# EAGLE board esp-module-cu (EAGLE 9.6.2)
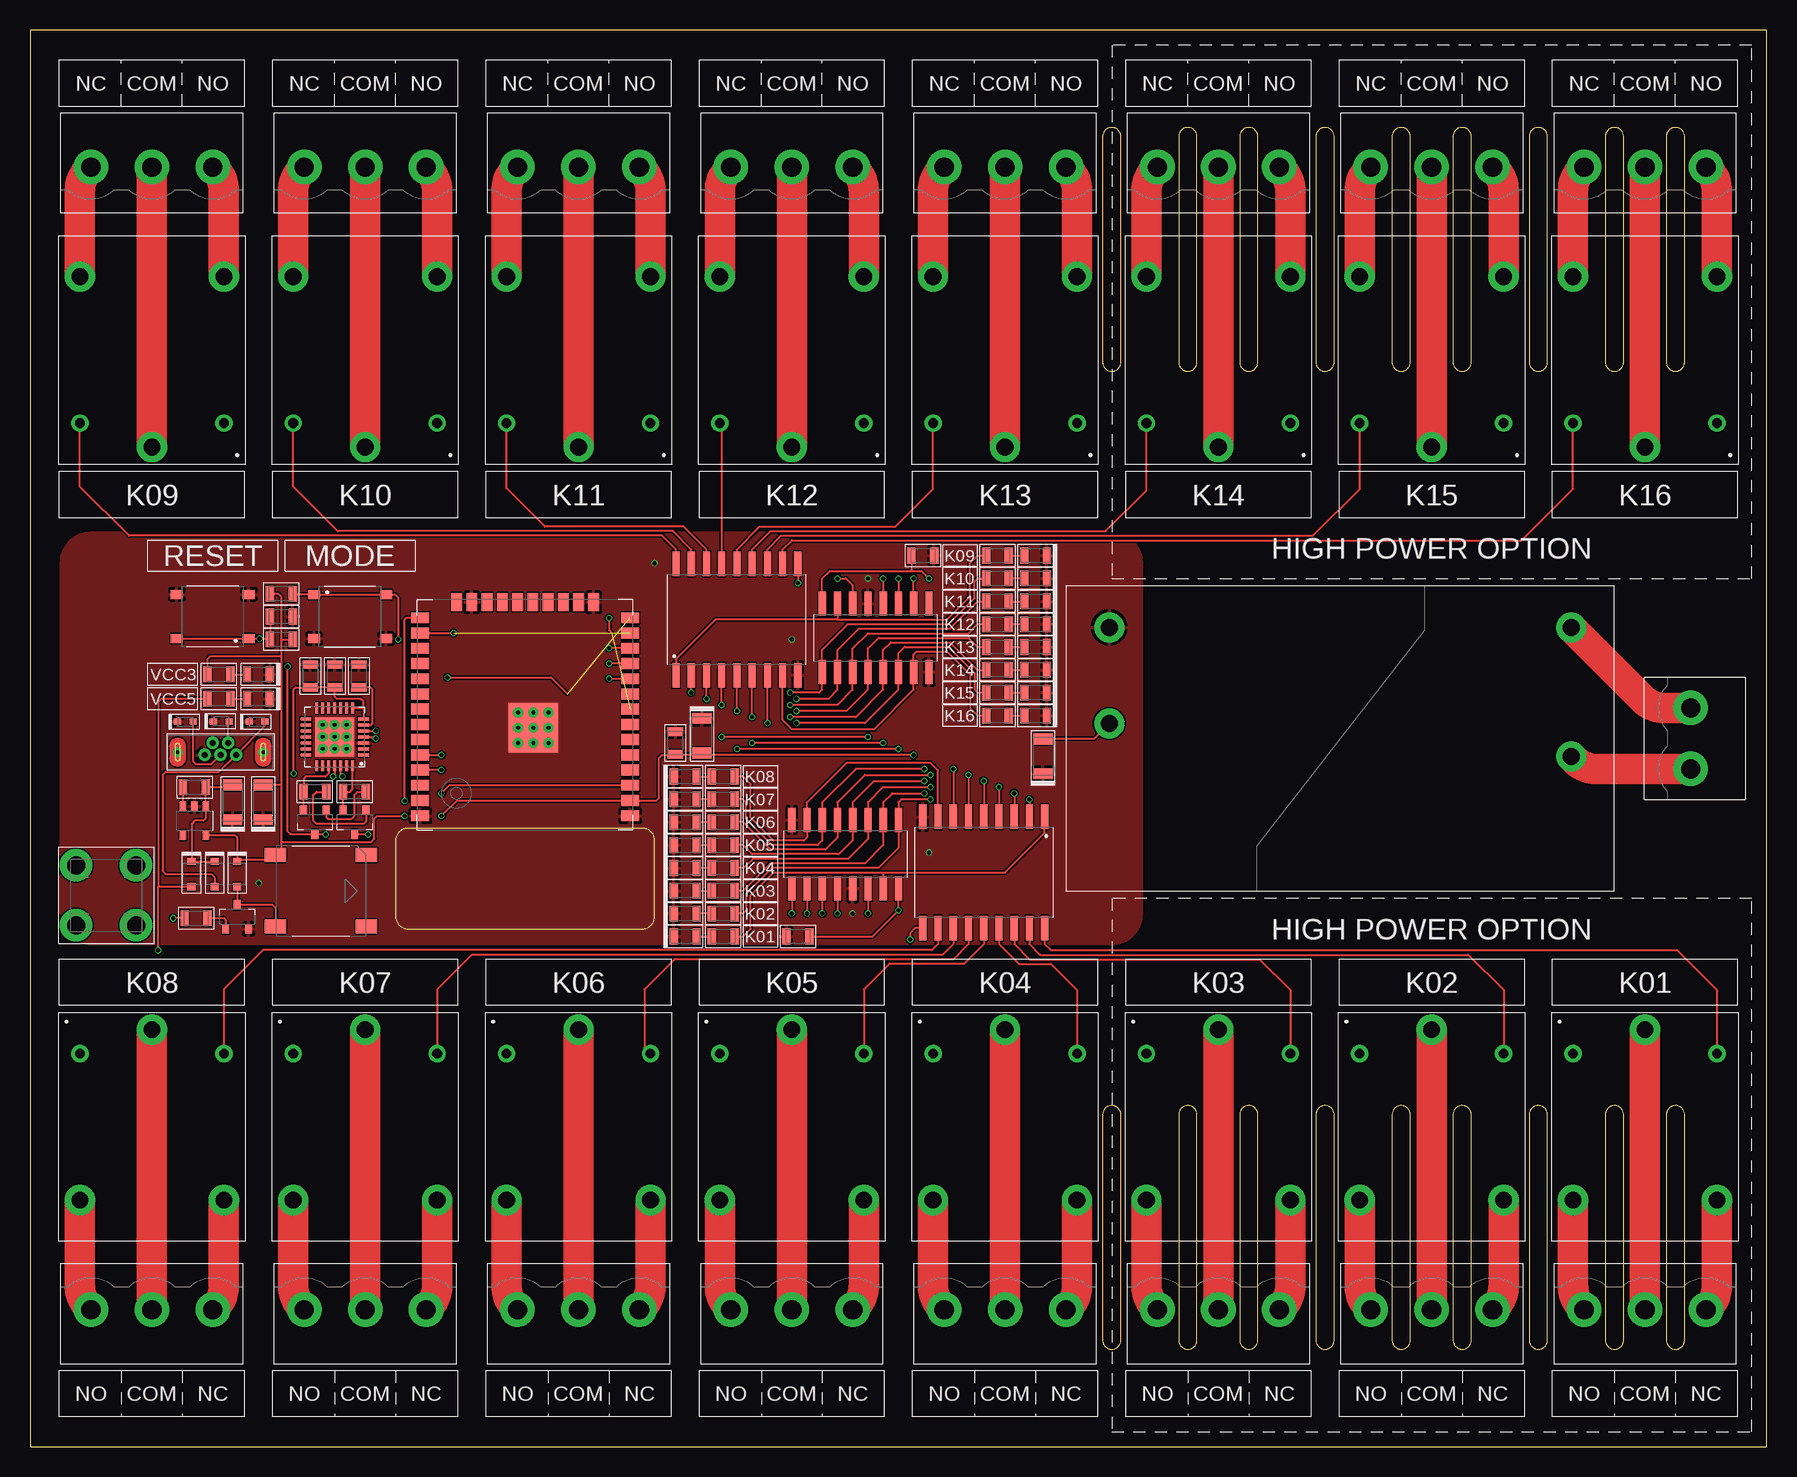
[diagram p0: board, top side]
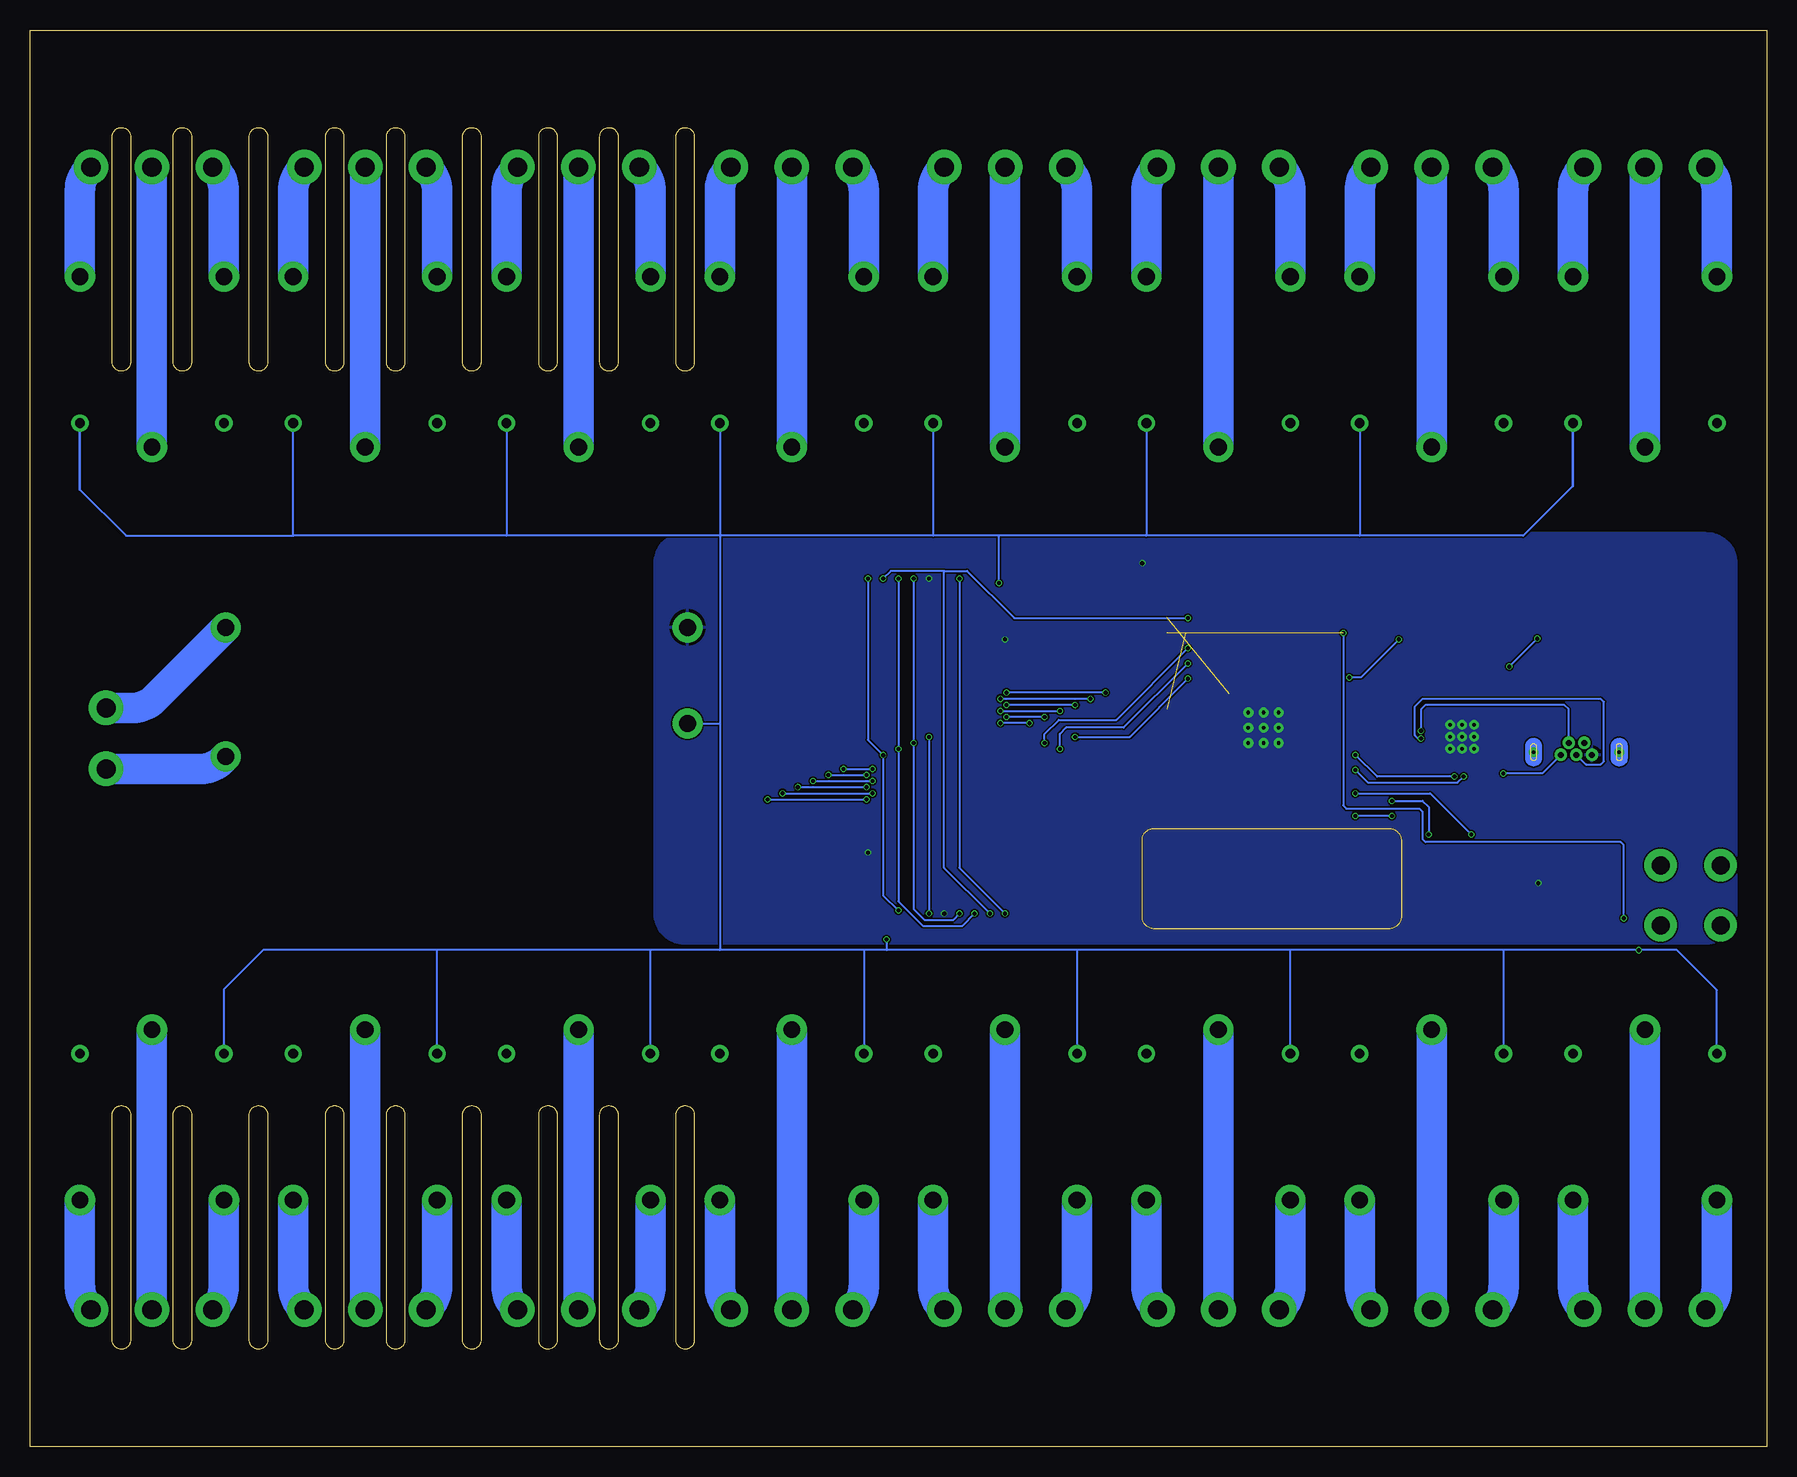
[diagram p1: board, bottom side, seen from below]

Size 144.78 x 118.11 mm. Coordinates in mm from the lower left corner, seen from the top.
Outline: 0,0 144.76,0 144.78,118.11 0,118.11 0,0
Copper layers (1*16): Top 0.035mm / dielectric 1.6mm / Bottom 0.035mm
Design rules "jlcpcb-2layers": minimum track width 5mil, minimum drill 0.3mm, track to track 5mil, track to pad 5mil, pad to pad 5mil, via to via 5mil, smd to smd 5mil, copper to edge 0.2mm, drill to drill 6mil, minimum pad ring 10mil, minimum via ring 3mil, stop-mask expansion 4mil, vias tented up to drill 0mil, thermal gap 10mil
Milling: 116 lines

## Footprints (pad centres in the part's own frame; a part is rotated, then mirrored left to right if it is on the bottom)
I1206-M3216-D = smd 0.9 x 1.6: 1 -1.45,0; 2 1.45,0
I0805-M2012-C = smd 0.7 x 1.3: 1 -0.95,0; 2 0.95,0
SOD-523 = smd 0.6 x 0.5: 1 -0.66,0; 2 0.66,0
SOD-323 = smd 0.6 x 0.7: 1 -1.055,0; 2 1.055,0
USB-A-MICRO-TOP = drill 0.5 pad 0.9: 1 -1.3,0.22; 2 -0.65,-0.78; 3 0,0.22; 4 0.65,-0.78; 5 1.3,0.22 | drill 0.3 pad 0.36: 6 3.57,0; 7 -3.57,0
KF2EDGV-5.08-2P = drill 1.6: 1 -2.54,0; 2 2.54,0
KF2EDGV-5.08-3P = drill 1.6: 1 -5.08,0; 2 0,0; 3 5.08,0
SRD = drill 0.8: 1 -6,6.1; 2 6,6.1 | drill 1.4: 3 0,8.1; 4 6,-6.1; 5 -6,-6.1
I0805-M2012-D = smd 0.7 x 1.3: 1 -0.95,0; 2 0.95,0
SMA = drill 1.5: 1 -2.5,2.5; 2 2.5,2.5; 3 -2.5,-2.5; 4 2.5,-2.5
IRM-10 = drill 1.4: 1 -19.25,-9.25; 2 -19.25,1.5; 3 19.25,-1.25; 4 19.25,-9.25
I0805-M2012-R = smd 0.7 x 1.3: 1 -0.95,0; 2 0.95,0
SMD-SW-4 = smd 1 x 0.75: 1 -3,1.85; 2 3,1.85; 3 -3,-1.85; 4 3,-1.85
SOT-23-3 = smd 0.8 x 0.6: 1 1.01,-0.95; 2 1.01,0.95; 3 -1.01,0
QFN-28 = smd 0.9 x 0.25: 1 -2.4,1.5; 2 -2.4,1; 3 -2.4,0.5; 4 -2.4,0; 5 -2.4,-0.5; 6 -2.4,-1; 7 -2.4,-1.5; 15 2.4,-1.5; 16 2.4,-1; 17 2.4,-0.5; 18 2.4,0; 19 2.4,0.5; 20 2.4,1; 21 2.4,1.5 | smd 0.25 x 0.9: 8 -1.5,-2.4; 9 -1,-2.4; 10 -0.5,-2.4; 11 0,-2.4; 12 0.5,-2.4; 13 1,-2.4; 14 1.5,-2.4; 22 1.5,2.4; 23 1,2.4; 24 0.5,2.4; 25 0,2.4; 26 -0.5,2.4; 27 -1,2.4; 28 -1.5,2.4 | smd 3.25 x 3.25: 29 0,0 | drill 0.3 pad 0.5: 30 -1,1; 31 0,1; 32 1,1; 33 -1,0; 34 0,0; 35 1,0; 36 -1,-1; 37 0,-1; 38 1,-1
SMD-BUZZER = smd 1.78 x 1.15: 1 -3.795,2.98; 2 -3.795,-2.98; 3 3.795,-2.98; 4 3.795,2.98
ESP32-WROOM-32UE = smd 1.5 x 0.9: 1 -8.75,7.34; 2 -8.75,6.07; 3 -8.75,4.8; 4 -8.75,3.53; 5 -8.75,2.26; 6 -8.75,0.99; 7 -8.75,-0.28; 8 -8.75,-1.55; 9 -8.75,-2.82; 10 -8.75,-4.09; 11 -8.75,-5.36; 12 -8.75,-6.63; 13 -8.75,-7.9; 14 -8.75,-9.17; 25 8.75,-9.17; 26 8.75,-7.9; 27 8.75,-6.63; 28 8.75,-5.36; 29 8.75,-4.09; 30 8.75,-2.82; 31 8.75,-1.55; 32 8.75,-0.28; 33 8.75,0.99; 34 8.75,2.26; 35 8.75,3.53; 36 8.75,4.8; 37 8.75,6.07; 38 8.75,7.34 | smd 0.9 x 1.5: 15 -5.715,-10.47; 16 -4.445,-10.47; 17 -3.175,-10.47; 18 -1.905,-10.47; 19 -0.635,-10.47; 20 0.635,-10.47; 21 1.905,-10.47; 22 3.175,-10.47; 23 4.445,-10.47; 24 5.715,-10.47 | smd 4.1 x 4.1: 39 -0.68,0 | drill 0.3 pad 0.5: 40 0.59,-1.27; 41 -0.68,-1.27; 42 -1.95,-1.27; 43 0.59,0; 44 -0.68,0; 45 -1.95,0; 46 0.59,1.27; 47 -0.68,1.27; 48 -1.95,1.27
SOIC-16 = smd 2 x 0.6: 1 -2.86,4.445; 2 -2.86,3.175; 3 -2.86,1.905; 4 -2.86,0.635; 5 -2.86,-0.635; 6 -2.86,-1.905; 7 -2.86,-3.175; 8 -2.86,-4.445; 9 2.86,-4.445; 10 2.86,-3.175; 11 2.86,-1.905; 12 2.86,-0.635; 13 2.86,0.635; 14 2.86,1.905; 15 2.86,3.175; 16 2.86,4.445
SOIC-18 = smd 2.06 x 0.6: 1 -4.64,5.08; 2 -4.64,3.81; 3 -4.64,2.54; 4 -4.64,1.27; 5 -4.64,0; 6 -4.64,-1.27; 7 -4.64,-2.54; 8 -4.64,-3.81; 9 -4.64,-5.08; 10 4.64,-5.08; 11 4.64,-3.81; 12 4.64,-2.54; 13 4.64,-1.27; 14 4.64,0; 15 4.64,1.27; 16 4.64,2.54; 17 4.64,3.81; 18 4.64,5.08
SOT-25-5 = smd 0.55 x 0.8: 1 0.95,1.2; 2 0,1.2; 3 -0.95,1.2; 4 -0.95,-1.2; 5 0.95,-1.2

## Placement (x,y rotation side)
C1  22uF  [I1206-M3216-D]  84.45,57.56 270 top
C2  1U  [I0805-M2012-C]  25.4,64.26 270 top
C3  100nF  [I0805-M2012-C]  23.37,64.26 270 top
C4  22uF  [I1206-M3216-D]  16.89,53.72 270 top
C5  22uF  [I1206-M3216-D]  19.43,53.72 270 top
C6  10uF  [I1206-M3216-D]  56.01,59.28 90 top
C7  100nF  [I0805-M2012-C]  53.8,58.67 90 top
C8  100nF  [I0805-M2012-C]  20.95,69.22 0 top
C9  100nF  [I0805-M2012-C]  27.43,64.26 270 top
C10  100nF  [I0805-M2012-C]  64.01,42.55 180 top
C11  100nF  [I0805-M2012-C]  74.42,74.3 0 top
D1  5.0V  [SOD-523]  18.92,60.45 180 top
D2  30V  [SOD-323]  13.46,47.75 90 top
D3  5.0V  [SOD-523]  12.95,60.45 180 top
D4  5.0V  [SOD-523]  15.95,60.48 180 top
D5  30V  [SOD-323]  15.39,47.75 90 top
D8  30V  [SOD-323]  17.27,47.75 90 top
J1  USB-A-MICRO-TOP  [USB-A-MICRO-TOP]  15.88,57.91 180 top
J2  2P  [KF2EDGV-5.08-2P]  138.43,59.05 90 top
J5  3P  [KF2EDGV-5.08-3P]  134.62,11.43 0 top
J6  3P  [KF2EDGV-5.08-3P]  116.84,11.43 0 top
J7  3P  [KF2EDGV-5.08-3P]  99.06,11.43 0 top
J8  3P  [KF2EDGV-5.08-3P]  81.28,11.43 0 top
J9  3P  [KF2EDGV-5.08-3P]  63.5,11.43 0 top
J10  3P  [KF2EDGV-5.08-3P]  45.72,11.43 0 top
J11  3P  [KF2EDGV-5.08-3P]  27.94,11.43 0 top
J12  3P  [KF2EDGV-5.08-3P]  10.16,11.43 0 top
J13  3P  [KF2EDGV-5.08-3P]  10.16,106.68 180 top
J14  3P  [KF2EDGV-5.08-3P]  27.94,106.68 180 top
J15  3P  [KF2EDGV-5.08-3P]  45.72,106.68 180 top
J16  3P  [KF2EDGV-5.08-3P]  63.5,106.68 180 top
J17  3P  [KF2EDGV-5.08-3P]  81.28,106.68 180 top
J18  3P  [KF2EDGV-5.08-3P]  99.06,106.68 180 top
J19  3P  [KF2EDGV-5.08-3P]  116.84,106.68 180 top
J20  3P  [KF2EDGV-5.08-3P]  134.62,106.68 180 top
K1  5V  [SRD]  134.62,26.67 0 top
K2  5V  [SRD]  116.84,26.67 0 top
K3  5V  [SRD]  99.06,26.67 0 top
K4  5V  [SRD]  81.28,26.67 0 top
K5  5V  [SRD]  63.5,26.67 0 top
K6  5V  [SRD]  45.72,26.67 0 top
K7  5V  [SRD]  27.94,26.67 0 top
K8  5V  [SRD]  10.16,26.67 0 top
K9  5V  [SRD]  10.16,91.44 180 top
K10  5V  [SRD]  27.94,91.44 180 top
K11  5V  [SRD]  45.72,91.44 180 top
K12  5V  [SRD]  63.5,91.44 180 top
K13  5V  [SRD]  81.28,91.44 180 top
K14  5V  [SRD]  99.06,91.44 180 top
K15  5V  [SRD]  116.84,91.44 180 top
K16  5V  [SRD]  134.62,91.44 180 top
LED1  RED  [I0805-M2012-D]  19.05,62.36 0 top
LED2  RED  [I0805-M2012-D]  19.05,64.39 0 top
LED5  RED  [I0805-M2012-D]  54.61,42.55 180 top
LED6  RED  [I0805-M2012-D]  54.61,44.45 180 top
LED7  RED  [I0805-M2012-D]  54.61,46.35 180 top
LED8  RED  [I0805-M2012-D]  54.61,48.26 180 top
LED9  RED  [I0805-M2012-D]  54.61,50.16 180 top
LED10  RED  [I0805-M2012-D]  54.61,52.07 180 top
LED11  RED  [I0805-M2012-D]  54.61,53.98 180 top
LED12  RED  [I0805-M2012-D]  54.61,55.88 180 top
LED13  RED  [I0805-M2012-D]  83.82,74.3 0 top
LED14  RED  [I0805-M2012-D]  83.82,72.39 0 top
LED15  RED  [I0805-M2012-D]  83.82,70.48 0 top
LED16  RED  [I0805-M2012-D]  83.82,68.58 0 top
LED17  RED  [I0805-M2012-D]  83.82,66.67 0 top
LED18  RED  [I0805-M2012-D]  83.82,64.77 0 top
LED19  RED  [I0805-M2012-D]  83.82,62.87 0 top
LED20  RED  [I0805-M2012-D]  83.82,60.96 0 top
P1  2P  [CONNECTOR-DEFAULT]  140.97,59.05 180 top
P3  3P  [CONNECTOR-DEFAULT]  134.62,8.26 0 top
P4  3P  [CONNECTOR-DEFAULT]  116.84,8.26 0 top
P5  3P  [CONNECTOR-DEFAULT]  99.06,8.26 0 top
P6  3P  [CONNECTOR-DEFAULT]  81.28,8.26 0 top
P7  3P  [CONNECTOR-DEFAULT]  63.5,8.26 0 top
P8  3P  [CONNECTOR-DEFAULT]  45.72,8.26 0 top
P9  3P  [CONNECTOR-DEFAULT]  27.94,8.26 0 top
P10  3P  [CONNECTOR-DEFAULT]  10.16,8.26 0 top
P11  3P  [CONNECTOR-DEFAULT]  10.16,109.86 0 top
P12  3P  [CONNECTOR-DEFAULT]  27.94,109.86 0 top
P13  3P  [CONNECTOR-DEFAULT]  45.72,109.86 0 top
P14  3P  [CONNECTOR-DEFAULT]  63.5,109.86 0 top
P15  3P  [CONNECTOR-DEFAULT]  81.28,109.86 0 top
P16  3P  [CONNECTOR-DEFAULT]  99.06,109.86 0 top
P17  3P  [CONNECTOR-DEFAULT]  116.84,109.86 0 top
P18  3P  [CONNECTOR-DEFAULT]  134.62,109.86 0 top
P19  IPEX-SMA  [SMA]  6.35,45.97 0 top
PU1  IRM-10-5  [IRM-10]  109.22,59.05 180 top
R1  10k  [I0805-M2012-R]  27.05,54.61 0 top
R2  10k  [I0805-M2012-R]  23.75,54.61 0 top
R3  10k  [I0805-M2012-R]  20.95,67.31 180 top
R4  220  [I0805-M2012-R]  15.75,62.36 0 top
R5  220  [I0805-M2012-R]  15.75,64.39 0 top
R6  100k  [I0805-M2012-R]  13.72,54.99 180 top
R8  220  [I0805-M2012-R]  57.78,42.55 180 top
R9  220  [I0805-M2012-R]  57.78,44.45 180 top
R10  220  [I0805-M2012-R]  57.78,46.35 180 top
R11  220  [I0805-M2012-R]  57.78,48.26 180 top
R12  220  [I0805-M2012-R]  57.78,50.16 180 top
R13  220  [I0805-M2012-R]  57.78,52.07 180 top
R14  220  [I0805-M2012-R]  57.78,53.98 180 top
R15  220  [I0805-M2012-R]  57.78,55.88 180 top
R16  220  [I0805-M2012-R]  80.64,74.3 0 top
R17  220  [I0805-M2012-R]  80.64,72.39 0 top
R18  220  [I0805-M2012-R]  80.64,70.48 0 top
R19  220  [I0805-M2012-R]  80.64,68.58 0 top
R20  220  [I0805-M2012-R]  80.64,66.67 0 top
R21  220  [I0805-M2012-R]  80.64,64.77 0 top
R22  220  [I0805-M2012-R]  80.64,62.87 0 top
R23  220  [I0805-M2012-R]  80.64,60.96 0 top
R24  10k  [I0805-M2012-R]  20.95,71.12 0 top
R25  220  [I0805-M2012-R]  13.84,44.07 0 top
S1  SPST  [SMD-SW-4]  15.24,69.22 180 top
S2  SPST  [SMD-SW-4]  26.67,69.22 0 top
T1  BC817  [SOT-23-3]  23.75,52.07 90 top
T2  BC817  [SOT-23-3]  27.05,52.07 90 top
T3  BC817  [SOT-23-3]  17.27,44.2 270 top
U1  CP2102  [QFN-28]  25.4,59.18 180 top
U2  BUZZER  [SMD-BUZZER]  24.26,46.35 0 top
U3  ESP32-WROOM-32UE  [ESP32-WROOM-32UE]  41.27,59.94 180 top
U4  74HC595  [SOIC-16]  67.94,49.4 270 top
U5  74HC595  [SOIC-16]  70.48,67.44 90 top
U6  ULN2803  [SOIC-18]  79.5,47.88 270 top
U7  ULN2803  [SOIC-18]  58.93,68.96 90 top
U8  AP2112  [SOT-25-5]  13.72,52.2 0 top

## Library data of the parts
C1 C4 C5 = deiring-components; LCSC: C11366; MF: Kyocera AVX; MPN: TAJA226K010RNJ; VOLTAGE: 10V
C2 = deiring-components; LCSC: C215803; MF: FH (Guangdong Fenghua Advanced Tech); MPN: 0805B105K500NT; TOLERANCE: 10%; VOLTAGE: 50V
C3 C7-C11 = deiring-components; LCSC: C38141; MF: FH (Guangdong Fenghua Advanced Tech); MPN: 0805B104K500NT; TOLERANCE: 10%; VOLTAGE: 50V
C6 = deiring-components; LCSC: C7171; MF: Kyocera AVX; MPN: TAJA106K016RNJ; VOLTAGE: 16V
D1 D3 D4 = deiring-components; LCSC: C383211; MF: LRC; MPN: LESD5D5.0CT1G
D2 D5 D8 = deiring-components; LCSC: C124187; MF: Diodes Incorporated; MPN: BAT760-7
J1 = deiring-components; LCSC: C437032; MF: XKB Connectivity; MPN: U255-051N-4BH70-FS
J2 = deiring-components; LCSC: C441354; MF: Cixi Kefa Elec; MPN: KF2EDGV-5.08-2P
J5-J20 = deiring-components; LCSC: C441355; MF: Cixi Kefa Elec; MPN: KF2EDGV-5.08-3P
K1-K16 = deiring-components; LCSC: C35449; MF: Ningbo Songle Relay; MPN: SRD-05VDC-SL-C
LED1 LED2 LED5-LED20 = deiring-components; LCSC: C84256; MF: Foshan NationStar Optoelectronics; MPN: FC-2012HRK-620D
P1 = deiring-components; LCSC: C440880; MF: Cixi Kefa Elec; MPN: KF2EDGK-5.08-2P
P3-P18 = deiring-components; LCSC: C440881; MF: Cixi Kefa Elec; MPN: KF2EDGK-5.08-3P
P19 = deiring-components; LCSC: C1509178; MF: HJ-IPEX1-SMA-RG1.13-35mm; MPN: HJ Tech
PU1 = deiring-components; MF: Mean Well; MPN: IRM-10-5; WATTAGE: 10W
R1-R3 R24 = deiring-components; LCSC: C17414; MF: UNI-ROYAL(Uniroyal Elec); MPN: 0805W8F1002T5E; WATTAGE: 1/8W
R4 R5 R8-R23 R25 = deiring-components; LCSC: C17557; MF: UNI-ROYAL(Uniroyal Elec); MPN: 0805W8F2200T5E; WATTAGE: 1/8W
R6 = deiring-components; LCSC: C149504; MF: UNI-ROYAL(Uniroyal Elec); MPN: 0805W8F1003T5E; WATTAGE: 1/8W
S1 S2 = deiring-components; LCSC: C318884; MF: XKB Enterprise; MPN: TS-1187A-B-A-B; VOLTAGE: 12V
T1-T3 = deiring-components; LCSC: C52801; MF: Nexperia; MPN: BC817-40,215
U1 = deiring-components; LCSC: C6568; MF: SILICON LABS; MPN: CP2102-GMR
U2 = deiring-components; LCSC: C95299; MF: MLT-7525; MPN: Jiangsu Huaneng Elec
U3 = deiring-components; LCSC: C701346; MF: Espressif Systems; MPN: ESP32-WROOM-32UE-N16; VALUES: ESP32
U4 U5 = deiring-components; LCSC: C5947; MF: 74HC595D,118; MPN: Nexperia
U6 U7 = deiring-components; LCSC: C2758014; MF: Texas Instruments; MPN: ULN2803
U8 = deiring-components; LCSC: C3021085; MF: TECH PUBLIC; MPN: TPAP2112K-3.3TRG1

## Nets
!MR: U3.8 U4.10 U5.10
APEN: R6.2 U8.3
BUZ: R25.1 U3.13 U3.26
BZB: R25.2 T3.1
BZC: D8.1 T3.3 U2.2
D+: D3.1 J1.3 U1.4
D-: D4.1 J1.2 U1.5
DS: U3.10 U4.14
DTR1: R1.1 T2.2 U1.28
DTRT1: R1.2 T1.1
EN: C8.1 R3.2 S1.1 S1.2 T1.3 U3.3
GND: C1.2 C2.1 C3.1 C4.2 C5.2 C6.2 C7.2 C8.2 C9.1 C10.2 C11.2 D1.2 D3.2 D4.2 J1.5 J1.6 J1.7 LED1.2 LED2.2 LED5.2 LED6.2 LED7.2 LED8.2 LED9.2 LED10.2 LED11.2 LED12.2 LED13.2 LED14.2 LED15.2 LED16.2 LED17.2 LED18.2 LED19.2 LED20.2 PU1.4 S1.3 S1.4 S2.3 S2.4 T3.2 U1.3 U1.29 U1.30 U1.31 U1.32 U1.33 U1.34 U1.35 U1.36 U1.37 U1.38 U3.1 U3.15 U3.23 U3.38 U3.39 U3.40 U3.41 U3.42 U3.43 U3.44 U3.45 U3.46 U3.47 U3.48 U4.8 U4.13 U5.8 U5.13 U6.9 U7.9 U8.2
IO00: T2.3 U3.25
K1/A2: K1.2 U6.18
K1/COM: J5.2 K1.3
K1/NC: J5.3 K1.4
K1/NO: J5.1 K1.5
K1LED: LED5.1 R8.2
K2/A2: K2.2 U6.17
K2/COM: J6.2 K2.3
K2/NC: J6.3 K2.4
K2/NO: J6.1 K2.5
K2LED1: LED6.1 R9.2
K3/A2: K3.2 U6.16
K3/COM: J7.2 K3.3
K3/NC: J7.3 K3.4
K3/NO: J7.1 K3.5
K3LED1: LED7.1 R10.2
K4/A2: K4.2 U6.15
K4/COM: J8.2 K4.3
K4/NC: J8.3 K4.4
K4/NO: J8.1 K4.5
K4LED1: LED8.1 R11.2
K5/A2: K5.2 U6.14
K5/COM: J9.2 K5.3
K5/NC: J9.3 K5.4
K5/NO: J9.1 K5.5
K5LED1: LED9.1 R12.2
K6/A2: K6.2 U6.13
K6/COM: J10.2 K6.3
K6/NC: J10.3 K6.4
K6/NO: J10.1 K6.5
K6LED1: LED10.1 R13.2
K7/A2: K7.2 U6.12
K7/COM: J11.2 K7.3
K7/NC: J11.3 K7.4
K7/NO: J11.1 K7.5
K7LED1: LED11.1 R14.2
K8/A2: K8.2 U6.11
K8/COM: J12.2 K8.3
K8/NC: J12.3 K8.4
K8/NO: J12.1 K8.5
K8LED1: LED12.1 R15.2
K9/A2: K9.2 U7.18
K9/COM: J13.2 K9.3
K9/NC: J13.3 K9.4
K9/NO: J13.1 K9.5
K09LED: LED13.1 R16.2
K10/A2: K10.2 U7.17
K10/COM: J14.2 K10.3
K10/NC: J14.3 K10.4
K10/NO: J14.1 K10.5
K10LED: LED14.1 R17.2
K11/A2: K11.2 U7.16
K11/COM: J15.2 K11.3
K11/NC: J15.3 K11.4
K11/NO: J15.1 K11.5
K11LED: LED15.1 R18.2
K12/A2: K12.2 U7.15
K12/COM: J16.2 K12.3
K12/NC: J16.3 K12.4
K12/NO: J16.1 K12.5
K12LED: LED16.1 R19.2
K13/A2: K13.2 U7.14
K13/COM: J17.2 K13.3
K13/NC: J17.3 K13.4
K13/NO: J17.1 K13.5
K13LED: LED17.1 R20.2
K14/A2: K14.2 U7.13
K14/COM: J18.2 K14.3
K14/NC: J18.3 K14.4
K14/NO: J18.1 K14.5
K14LED: LED18.1 R21.2
K15/A2: K15.2 U7.12
K15/COM: J19.2 K15.3
K15/NC: J19.3 K15.4
K15/NO: J19.1 K15.5
K15LED: LED19.1 R22.2
K16/A2: K16.2 U7.11
K16/COM: J20.2 K16.3
K16/NC: J20.3 K16.4
K16/NO: J20.1 K16.5
K16LED: LED20.1 R23.2
L: J2.2 PU1.1
MODE: R24.2 S2.1 S2.2 U3.14
N: J2.1 PU1.2
O1: R8.1 U4.15 U6.1
O2: R9.1 U4.1 U6.2
O3: R10.1 U4.2 U6.3
O4: R11.1 U4.3 U6.4
O5: R12.1 U4.4 U6.5
O6: R13.1 U4.5 U6.6
O7: R14.1 U4.6 U6.7
O8: R15.1 U4.7 U6.8
O9: R16.1 U5.15 U7.1
O10: R17.1 U5.1 U7.2
O11: R18.1 U5.2 U7.3
O12: R19.1 U5.3 U7.4
O13: R20.1 U5.4 U7.5
O14: R21.1 U5.5 U7.6
O15: R22.1 U5.6 U7.7
O16: R23.1 U5.7 U7.8
Q7S: U4.9 U5.14
RTS1: R2.1 T1.2 U1.24
RTST1: R2.2 T2.1
RXD0: U1.26 U3.34
SHCP: U3.11 U4.11 U5.11
STCP: U3.12 U4.12 U5.12
TXD0: U1.25 U3.35
VBUS: C2.2 C3.2 D1.1 D5.1 J1.1 U1.7 U1.8
VCC3: C5.1 C6.1 C7.1 C10.1 C11.1 D8.2 R3.1 R5.1 R24.1 U2.1 U3.2 U4.16 U5.16 U8.5
VCC5: C1.1 D2.1 K1.1 K2.1 K3.1 K4.1 K5.1 K6.1 K7.1 K8.1 K9.1 K10.1 K11.1 K12.1 K13.1 K14.1 K15.1 K16.1 PU1.3 R4.1 U6.10 U7.10
VCCLED1: LED2.1 R5.2
VCCLED2: LED1.1 R4.2
VDD: C9.2 U1.6
VIN: C4.1 D2.2 D5.2 R6.1 U8.1

## Tracks (layer width: path | path; a pad name or v marks a point on that pad's centre or on a via)
!MR  (via drill 0.35)  (1 unrouted)
  Top 0.152: U4.10 v64.77,44.45 | U5.10 v73.66,72.39 | v48.26,69.09 48.26,68.07 48.49,67.84
  Bottom 0.152: v64.77,44.45 68.58,48.26 68.58,73.03 | v73.66,72.39 73.03,73.03 68.58,73.03 | 68.58,73.03 66.67,73.03 62.74,69.09 v48.26,69.09
APEN
  Top 0.152: U8.3 R6.2
BUZ  (via drill 0.35)  (1 unrouted)
  Top 0.152: R25.1 v11.94,44.07 | U3.26 v35.31,67.84
  Bottom 0.152: v35.31,67.84 35.31,53.47 35.05,53.21 28.96,53.21 28.7,52.96 28.7,50.67 28.45,50.42 12.19,50.42 11.94,50.16 v11.94,44.07
BZB
  Top 0.152: R25.2 16.13,44.07 16.32,43.88 T3.1
BZC
  Top 0.152: U2.2 20.46,44.94 20.2,45.21 T3.3 D8.1
D+  (via drill 0.35)
  Top 0.152: U1.4 28.7,59.18 v28.83,59.05 | J1.3 15.08,56.9 13.84,56.9 13.59,57.15 13.59,60.45 D3.1
  Bottom 0.152: J1.3 15.08,56.9 13.84,56.9 13.59,57.15 13.59,62.1 13.84,62.36 28.7,62.36 29.34,61.72 29.34,59.31 29.08,59.05 v28.83,59.05
D-  (via drill 0.35)
  Top 0.152: U1.5 v28.83,59.69 | J1.2 16.52,60.48 D4.1
  Bottom 0.152: J1.2 16.52,61.49 16.89,61.85 28.45,61.85 28.83,61.47 v28.83,59.69
DS  (via drill 0.35)
  Top 0.152: U4.14 v69.85,44.45 | v69.85,59.18 v57.66,59.18 | v48.26,64.03 U3.10
  Bottom 0.152: v69.85,59.18 v69.85,44.45 | v57.66,59.18 53.11,59.18 v48.26,64.03
DTR1
  Top 0.152: T2.2 R1.1 26.67,54.61 26.9,54.84 U1.28
DTRT1
  Top 0.152: T1.1 24.7,52.52 24.89,52.32 26.8,52.32 27.05,52.58 27.05,54.36 27.3,54.61 R1.2
EN  (via drill 0.35)
  Top 0.152: C8.1 20,67.36 | T1.3 v24.64,51.05 21.72,51.05 21.46,51.31 v21.46,65.03 | S1.2 S1.1 v19.13,67.36 20,67.36 | 20,67.36 R3.2 | v34.29,54.48 34.95,55.14 U3.3
  Bottom 0.152: v34.29,54.48 28.07,54.48 v24.64,51.05 | v21.46,65.03 v19.13,67.36
GND  (via drill 0.35)
  other vias: 52.07,73.66 74.93,49.53 63.5,67.31 68.58,44.45 69.85,72.39 19.05,46.99
  pour Top: 2.54,73.66 2.54,44.45 arc90 5.08,41.91 90.17,41.91 arc90 92.71,44.45 92.71,73.66 arc90 90.17,76.2 5.08,76.2 arc90
  pour Bottom: 2.54,73.66 2.54,44.45 arc90 5.08,41.91 90.17,41.91 arc90 92.71,44.45 92.71,73.66 arc90 90.17,76.2 5.08,76.2 arc90
IO00  (via drill 0.35)
  Top 0.152: v28.19,51.05 T2.3 | v31.24,53.85 31.24,68.96 31.39,69.11 U3.25
  Bottom 0.152: v31.24,53.85 28.7,53.85 28.19,53.34 v28.19,51.05
K1/A2
  Top 0.152: U6.18 84.58,41.91 85.09,41.4 137.29,41.4 140.62,38.07 K1.2
K1/COM
  Top 2.54: K1.3 J5.2
  Bottom 2.54: J5.2 K1.3
K1/NC
  Top 2.54: K1.4 140.62,13.4 arc-45 139.88,11.61 J5.3
  Bottom 2.54: K1.4 140.62,13.4 arc-45 139.88,11.61 J5.3
K1/NO
  Top 2.54: K1.5 128.62,13.4 arc45 129.36,11.61 J5.1
  Bottom 2.54: K1.5 128.62,13.4 arc45 129.36,11.61 J5.1
K1LED
  Top 0.152: LED5.1 R8.2
K2/A2
  Top 0.152: U6.17 83.31,41.91 84.2,41.02 119.89,41.02 122.84,38.07 K2.2
K2/COM
  Top 2.54: K2.3 J6.2
  Bottom 2.54: J6.2 K2.3
K2/NC
  Top 2.54: K2.4 122.84,13.4 arc-45 122.1,11.61 J6.3
  Bottom 2.54: K2.4 122.84,13.4 arc-45 122.1,11.61 J6.3
K2/NO
  Top 2.54: K2.5 110.84,13.4 arc45 111.58,11.61 J6.1
  Bottom 2.54: K2.5 110.84,13.4 arc45 111.58,11.61 J6.1
K2LED1
  Top 0.152: R9.2 LED6.1
K3/A2
  Top 0.152: U6.16 82.04,41.91 83.31,40.64 102.49,40.64 105.06,38.07 K3.2
K3/COM
  Top 2.54: K3.3 J7.2
  Bottom 2.54: J7.2 K3.3
K3/NC
  Top 2.54: K3.4 105.06,13.4 arc-45 104.32,11.61 J7.3
  Bottom 2.54: K3.4 105.06,13.4 arc-45 104.32,11.61 J7.3
K3/NO
  Top 2.54: K3.5 93.06,13.4 arc45 93.8,11.61 J7.1
  Bottom 2.54: K3.5 93.06,13.4 arc45 93.8,11.61 J7.1
K3LED1
  Top 0.152: LED7.1 R10.2
K4/A2
  Top 0.152: U6.15 80.77,41.91 82.42,40.26 85.09,40.26 87.28,38.07 K4.2
K4/COM
  Top 2.54: K4.3 J8.2
  Bottom 2.54: J8.2 K4.3
K4/NC
  Top 2.54: K4.4 87.28,13.4 arc-45 86.54,11.61 J8.3
  Bottom 2.54: K4.4 87.28,13.4 arc-45 86.54,11.61 J8.3
K4/NO
  Top 2.54: K4.5 75.28,13.4 arc45 76.02,11.61 J8.1
  Bottom 2.54: K4.5 75.28,13.4 arc45 76.02,11.61 J8.1
K4LED1
  Top 0.152: R11.2 LED8.1
K5/A2
  Top 0.152: U6.14 79.5,41.91 77.85,40.26 71.63,40.26 69.5,38.13 K5.2
K5/COM
  Top 2.54: K5.3 J9.2
  Bottom 2.54: J9.2 K5.3
K5/NC
  Top 2.54: K5.4 69.5,13.4 arc-45 68.76,11.61 J9.3
  Bottom 2.54: K5.4 69.5,13.4 arc-45 68.76,11.61 J9.3
K5/NO
  Top 2.54: K5.5 57.5,13.4 arc45 58.24,11.61 J9.1
  Bottom 2.54: K5.5 57.5,13.4 arc45 58.24,11.61 J9.1
K5LED1
  Top 0.152: LED9.1 R12.2
K6/A2
  Top 0.152: U6.13 78.23,41.91 76.96,40.64 53.72,40.64 51.21,38.13 51.21,33.28 K6.2
K6/COM
  Top 2.54: K6.3 J10.2
  Bottom 2.54: J10.2 K6.3
K6/NC
  Top 2.54: K6.4 51.72,13.4 arc-45 50.98,11.61 J10.3
  Bottom 2.54: K6.4 51.72,13.4 arc-45 50.98,11.61 J10.3
K6/NO
  Top 2.54: K6.5 39.72,13.4 arc45 40.46,11.61 J10.1
  Bottom 2.54: K6.5 39.72,13.4 arc45 40.46,11.61 J10.1
K6LED1
  Top 0.152: LED10.1 R13.2
K7/A2
  Top 0.152: U6.12 76.96,41.91 76.07,41.02 36.83,41.02 33.94,38.13 K7.2
K7/COM
  Top 2.54: K7.3 J11.2
  Bottom 2.54: J11.2 K7.3
K7/NC
  Top 2.54: K7.4 33.94,13.4 arc-45 33.2,11.61 J11.3
  Bottom 2.54: K7.4 33.94,13.4 arc-45 33.2,11.61 J11.3
K7/NO
  Top 2.54: K7.5 21.94,13.4 arc45 22.68,11.61 J11.1
  Bottom 2.54: K7.5 21.94,13.4 arc45 22.68,11.61 J11.1
K7LED1
  Top 0.152: R14.2 LED11.1
K8/A2
  Top 0.152: U6.11 75.69,41.91 75.18,41.4 19.43,41.4 16.16,38.13 K8.2
K8/COM
  Top 2.54: K8.3 J12.2
  Bottom 2.54: K8.3 J12.2
K8/NC
  Top 2.54: K8.4 16.16,13.4 arc-45 15.42,11.61 J12.3
  Bottom 2.54: K8.4 16.16,13.4 arc-45 15.42,11.61 J12.3
K8/NO
  Top 2.54: K8.5 4.16,13.4 arc45 4.9,11.61 J12.1
  Bottom 2.54: K8.5 4.16,13.4 arc45 4.9,11.61 J12.1
K8LED1
  Top 0.152: LED12.1 R15.2
K9/A2
  Top 0.152: U7.18 53.85,74.8 52.7,75.95 8.26,75.95 4.16,80.04 K9.2
K9/COM
  Top 2.54: K9.3 J13.2
  Bottom 2.54: K9.3 J13.2
K9/NC
  Top 2.54: K9.4 4.16,104.71 arc-45 4.9,106.5 J13.3
  Bottom 2.54: K9.4 4.16,104.71 arc-45 4.9,106.5 J13.3
K9/NO
  Top 2.54: K9.5 16.16,104.71 arc45 15.42,106.5 J13.1
  Bottom 2.54: K9.5 16.16,104.71 arc45 15.42,106.5 J13.1
K09LED
  Top 0.152: R16.2 LED13.1
K10/A2
  Top 0.152: U7.17 55.12,74.8 53.59,76.33 25.65,76.33 21.94,80.04 K10.2
K10/COM
  Top 2.54: K10.3 J14.2
  Bottom 2.54: K10.3 J14.2
K10/NC
  Top 2.54: K10.4 21.94,104.71 arc-45 22.68,106.5 J14.3
  Bottom 2.54: K10.4 21.94,104.71 arc-45 22.68,106.5 J14.3
K10/NO
  Top 2.54: K10.5 33.94,104.71 arc45 33.2,106.5 J14.1
  Bottom 2.54: K10.5 33.94,104.71 arc45 33.2,106.5 J14.1
K10LED
  Top 0.152: LED14.1 R17.2
K11/A2
  Top 0.152: U7.16 56.39,74.8 54.48,76.71 42.93,76.71 39.72,79.91 K11.2
K11/COM
  Top 2.54: K11.3 J15.2
  Bottom 2.54: J15.2 K11.3
K11/NC
  Top 2.54: K11.4 39.72,104.71 arc-45 40.46,106.5 J15.3
  Bottom 2.54: K11.4 39.72,104.71 arc-45 40.46,106.5 J15.3
K11/NO
  Top 2.54: K11.5 51.72,104.71 arc45 50.98,106.5 J15.1
  Bottom 2.54: K11.5 51.72,104.71 arc45 50.98,106.5 J15.1
K11LED
  Top 0.152: R18.2 LED15.1
K12/A2
  Top 0.152: K12.2 57.66,85.18 U7.15
K12/COM
  Top 2.54: K12.3 J16.2
  Bottom 2.54: J16.2 K12.3
K12/NC
  Top 2.54: K12.4 57.5,104.71 arc-45 58.24,106.5 J16.3
  Bottom 2.54: K12.4 57.5,104.71 arc-45 58.24,106.5 J16.3
K12/NO
  Top 2.54: K12.5 69.5,104.71 arc45 68.76,106.5 J16.1
  Bottom 2.54: K12.5 69.5,104.71 arc45 68.76,106.5 J16.1
K12LED
  Top 0.152: R19.2 LED16.1
K13/A2
  Top 0.152: U7.14 58.93,74.8 60.83,76.71 72.14,76.71 75.28,79.85 K13.2
K13/COM
  Top 2.54: K13.3 J17.2
  Bottom 2.54: J17.2 K13.3
K13/NC
  Top 2.54: K13.4 75.28,104.71 arc-45 76.02,106.5 J17.3
  Bottom 2.54: K13.4 75.28,104.71 arc-45 76.02,106.5 J17.3
K13/NO
  Top 2.54: K13.5 87.28,104.71 arc45 86.54,106.5 J17.1
  Bottom 2.54: K13.5 87.28,104.71 arc45 86.54,106.5 J17.1
K13LED
  Top 0.152: R20.2 LED17.1
K14/A2
  Top 0.152: U7.13 60.2,74.8 61.72,76.33 89.66,76.33 93.06,79.72 K14.2
K14/COM
  Top 2.54: K14.3 J18.2
  Bottom 2.54: J18.2 K14.3
K14/NC
  Top 2.54: K14.4 93.06,104.71 arc-45 93.8,106.5 J18.3
  Bottom 2.54: K14.4 93.06,104.71 arc-45 93.8,106.5 J18.3
K14/NO
  Top 2.54: K14.5 105.06,104.71 arc45 104.32,106.5 J18.1
  Bottom 2.54: K14.5 105.06,104.71 arc45 104.32,106.5 J18.1
K14LED
  Top 0.152: R21.2 LED18.1
K15/A2
  Top 0.152: U7.12 61.47,74.8 62.61,75.95 106.93,75.95 110.84,79.85 K15.2
K15/COM
  Top 2.54: K15.3 J19.2
  Bottom 2.54: J19.2 K15.3
K15/NC
  Top 2.54: K15.4 110.84,104.71 arc-45 111.58,106.5 J19.3
  Bottom 2.54: K15.4 110.84,104.71 arc-45 111.58,106.5 J19.3
K15/NO
  Top 2.54: K15.5 122.84,104.71 arc45 122.1,106.5 J19.1
  Bottom 2.54: K15.5 122.84,104.71 arc45 122.1,106.5 J19.1
K15LED
  Top 0.152: R22.2 LED19.1
K16/A2
  Top 0.152: U7.11 62.74,74.8 63.5,75.56 124.33,75.56 128.62,79.85 K16.2
K16/COM
  Top 2.54: K16.3 J20.2
  Bottom 2.54: J20.2 K16.3
K16/NC
  Top 2.54: K16.4 128.62,104.71 arc-45 129.36,106.5 J20.3
  Bottom 2.54: K16.4 128.62,104.71 arc-45 129.36,106.5 J20.3
K16/NO
  Top 2.54: K16.5 140.62,104.71 arc45 139.88,106.5 J20.1
  Bottom 2.54: K16.5 140.62,104.71 arc45 139.88,106.5 J20.1
K16LED
  Top 0.152: R23.2 LED20.1
L
  Top 2.54: J2.2 136.23,61.59 arc-45 134.44,62.34 PU1.1
  Bottom 2.54: J2.2 136.23,61.59 arc-45 134.44,62.34 PU1.1
MODE  (via drill 0.35)  (1 unrouted)
  Top 0.152: R24.2 21.91,71.06 S2.1 S2.2 30.43,71.06 30.69,70.81 v30.69,67.31 | v34.8,64.14 43.43,64.14 44.8,62.76
  Bottom 0.152: v30.69,67.31 33.86,64.14 v34.8,64.14
N
  Top 2.54: J2.1 130.56,56.52 arc-45 128.77,57.26 PU1.2
  Bottom 2.54: J2.1 130.56,56.52 arc-45 128.77,57.26 PU1.2
O1
  Top 0.152: R8.1 59.44,42.55 60.07,43.18 60.07,45.97 61.98,47.88 71.12,47.88 | 71.12,47.88 U4.15 | 71.12,47.88 81.28,47.88 84.58,51.18 U6.1
O2  (via drill 0.35)
  Top 0.152: v75.06,53.98 72.64,53.98 72.39,53.72 U4.1 72.39,49.91 70.74,48.26 61.85,48.26 59.69,46.1 59.69,44.7 59.44,44.45 R9.1 | v83.31,53.98 U6.2
  Bottom 0.152: v83.31,53.98 v75.06,53.98
O3  (via drill 0.35)
  Top 0.152: v74.55,54.48 71.88,54.48 71.12,53.72 U4.2 71.12,50.16 69.6,48.64 61.72,48.64 59.44,46.35 R10.1 | v82.04,54.48 U6.3
  Bottom 0.152: v82.04,54.48 v74.55,54.48
O4  (via drill 0.35)
  Top 0.152: v75.06,54.99 71.12,54.99 69.85,53.72 U4.3 69.85,50.67 68.2,49.02 60.26,49.02 59.5,48.26 R11.1 | v80.77,54.99 U6.4
  Bottom 0.152: v80.77,54.99 v75.06,54.99
O5  (via drill 0.35)
  Top 0.152: v74.55,55.5 70.36,55.5 68.58,53.72 U4.4 68.58,50.55 67.44,49.4 60.2,49.4 59.44,50.16 R12.1 | v79.5,55.5 U6.5
  Bottom 0.152: v79.5,55.5 v74.55,55.5
O6  (via drill 0.35)
  Top 0.152: v75.06,56.01 69.6,56.01 67.31,53.72 U4.5 67.31,50.8 66.29,49.78 61.72,49.78 59.44,52.07 R13.1 | v78.23,56.01 U6.6
  Bottom 0.152: v78.23,56.01 v75.06,56.01
O7  (via drill 0.35)
  Top 0.152: v74.55,56.52 68.83,56.52 66.04,53.72 U4.6 66.04,50.55 65.66,50.16 61.85,50.16 59.69,52.32 59.69,53.72 59.44,53.98 R14.1 | v76.96,56.52 U6.7
  Bottom 0.152: v76.96,56.52 v74.55,56.52
O8
  Top 0.152: U6.8 75.69,56.39 75.06,57.02 68.07,57.02 64.77,53.72 U4.7 64.77,50.8 64.52,50.55 61.98,50.55 60.07,52.45 60.07,55.24 59.44,55.88 R15.1
O9
  Top 0.152: U5.15 67.31,68.96 | 67.31,68.96 76.45,68.96 78.36,70.87 78.36,73.66 78.99,74.3 R16.1 | 67.31,68.96 57.15,68.96 53.85,65.66 U7.1
O10  (via drill 0.35)
  Top 0.152: v63.37,62.87 65.79,62.87 66.04,63.12 U5.1 66.04,66.42 68.2,68.58 76.58,68.58 78.74,70.74 78.74,72.14 78.99,72.39 R17.1 | v55.12,62.87 U7.2
  Bottom 0.152: v55.12,62.87 v63.37,62.87
O11  (via drill 0.35)
  Top 0.152: v63.88,62.36 66.55,62.36 67.31,63.12 U5.2 67.31,66.42 69.09,68.2 76.71,68.2 78.99,70.48 R18.1 | v56.39,62.36 U7.3
  Bottom 0.152: v56.39,62.36 v63.88,62.36
O12  (via drill 0.35)
  Top 0.152: v63.37,61.85 67.31,61.85 68.58,63.12 U5.3 68.58,66.55 69.85,67.82 78.23,67.82 78.99,68.58 R19.1 | v57.66,61.85 U7.4
  Bottom 0.152: v57.66,61.85 v63.37,61.85
O13  (via drill 0.35)
  Top 0.152: v63.88,61.34 68.07,61.34 69.85,63.12 U5.4 69.85,66.55 70.74,67.44 78.23,67.44 78.99,66.67 R20.1 | v58.93,61.34 U7.5
  Bottom 0.152: v63.88,61.34 v58.93,61.34
O14  (via drill 0.35)
  Top 0.152: v63.37,60.83 68.83,60.83 71.12,63.12 U5.5 71.12,66.42 71.75,67.06 76.71,67.06 78.99,64.77 R21.1 | v60.2,60.83 U7.6
  Bottom 0.152: v60.2,60.83 v63.37,60.83
O15  (via drill 0.35)
  Top 0.152: v63.88,60.33 69.6,60.33 72.39,63.12 U5.6 72.39,66.17 72.9,66.67 76.58,66.67 78.74,64.52 78.74,63.12 78.99,62.87 R22.1 | v61.47,60.33 U7.7
  Bottom 0.152: v61.47,60.33 v63.88,60.33
O16
  Top 0.152: U7.8 62.74,60.58 63.5,59.82 70.36,59.82 73.66,63.12 U5.7 73.66,66.04 73.91,66.29 76.45,66.29 78.36,64.39 78.36,61.59 78.99,60.96 R23.1
Q7S  (via drill 0.35)
  Top 0.152: v67.31,72.39 68.01,72.39 68.58,71.82 U5.14 | U4.9 v63.5,44.45
  Bottom 0.152: v67.31,72.39 67.31,48.26 v63.5,44.45
RTS1
  Top 0.152: T1.2 R2.1 22.8,55.69 22.99,55.88 24.64,55.88 24.9,56.14 U1.24
RTST1
  Top 0.152: T2.1 28,52.13 27.81,51.94 23.88,51.94 23.62,52.2 23.62,54.36 23.88,54.61 R2.2
RXD0  (via drill 0.35)
  Top 0.152: U1.26 25.9,56.02 v26.04,55.88 | U3.34 v34.29,57.68
  Bottom 0.152: v34.29,57.68 32.49,55.88 v26.04,55.88
SHCP  (via drill 0.35)
  Top 0.152: v72.39,72.39 U5.11 | U4.11 v66.04,44.45 | v72.39,58.17 v58.93,58.17 | U3.11 v48.26,65.3
  Bottom 0.152: v72.39,72.39 v72.39,58.17 72.39,45.47 70.36,43.43 67.06,43.43 v66.04,44.45 | v58.93,58.17 58.93,59.44 58.42,59.94 53.62,59.94 v48.26,65.3
STCP  (via drill 0.35)
  Top 0.152: v71.12,72.39 U5.12 | U4.12 v67.31,44.45 | v71.12,58.67 v60.2,58.67 | U3.12 v48.26,66.57
  Bottom 0.152: v71.12,72.39 v71.12,58.67 71.12,44.83 70.23,43.94 67.82,43.94 v67.31,44.45 | v48.26,66.57 54.23,60.6 59.03,60.6 60.2,59.44 v60.2,58.67
TXD0  (via drill 0.35)
  Top 0.152: U1.25 25.4,56.01 v25.27,55.88 | v34.29,56.41 U3.35
  Bottom 0.152: v34.29,56.41 33.25,55.37 25.78,55.37 v25.27,55.88
VBUS  (via drill 0.35)
  Top 0.152: U1.8 27.8,61.58 | 27.8,61.58 U1.7 | 27.8,61.58 27.8,62.12 27.56,62.36 25.59,62.36 25.4,62.55 C2.2 C3.2 22.16,63.31 21.97,63.12 v21.97,56.13 | D5.1 15.39,47.47 15.11,47.75 11.3,47.75 11.05,48.01 11.05,56.01 11.3,56.26 15.74,56.26 J1.1 19.58,60.1 D1.1
  Bottom 0.152: J1.1 18.73,56.13 v21.97,56.13
VCC3  (via drill 0.35)
  Top 0.152: 53.8,57.66 52.7,57.66 52.45,57.4 52.45,54.1 52.22,53.87 U3.2 35.59,53.87 v34.29,52.58 | v73.66,57.66 53.8,57.66 | C6.1 55.9,57.72 C7.1 53.8,57.66 | C10.1 70.23,42.55 v72.39,44.7 U4.16 | U5.16 66.04,72.39 66.67,73.03 73.41,73.03 | R24.1 20.7,71.12 20.95,70.87 20.95,67.31 | 20.95,67.31 R3.1 | v74.93,72.39 74.3,73.03 73.41,73.03 | C11.1 73.47,73.09 73.41,73.03 | U2.1 20.46,49.31 | 20.46,49.31 20.46,48.93 17.27,48.93 D8.2 17.27,50.8 17.07,51 U8.5 | 20.95,67.31 20.95,65.91 | 20.95,65.91 20.95,55.17 | 20.95,55.17 C5.1 | R5.1 14.8,65.66 15.05,65.91 20.95,65.91 | 20.95,50.42 28.45,50.42 28.7,50.67 28.7,52.32 28.96,52.58 v31.24,52.58 | 20.95,55.17 20.95,50.42 | 20.95,50.42 20.95,49.31 20.46,49.31
  Bottom 0.152: v74.93,72.39 74.93,58.93 v73.66,57.66 73.66,45.97 v72.39,44.7 | v31.24,52.58 v34.29,52.58
VCC5  (via drill 0.35)
  Top 0.152: U7.10 v64.01,72.01 | U6.10 73.79,43.24 73.38,42.83 v73.38,42.29 | R4.1 10.92,62.36 10.67,62.1 10.67,46.7 | 10.67,46.7 D2.1 | PU1.3 88.67,59.01 C1.1 | v10.67,41.4 10.67,46.7
  Bottom 0.152: 16.16,80.11 20.32,75.95 33.94,75.95 | 105.06,75.95 122.84,75.95 | 122.84,75.95 K15.1 | 33.94,75.95 51.72,75.95 | 51.72,75.95 64.01,75.95 | 64.01,75.95 69.5,75.95 | 69.5,75.95 87.28,75.95 | 87.28,75.95 105.06,75.95 | K14.1 105.06,75.95 | K13.1 87.28,75.95 | K12.1 69.5,75.95 | K11.1 51.72,75.95 | K10.1 33.94,75.95 | K8.1 4.16,38.07 7.49,41.4 v10.67,41.4 21.94,41.4 | 110.84,41.4 125.35,41.4 128.62,38.13 K1.1 | 21.94,41.4 39.72,41.4 | 39.72,41.4 57.5,41.4 | 57.5,41.4 73.38,41.4 | 73.38,41.4 75.28,41.4 | 75.28,41.4 87.28,41.4 | 87.28,41.4 93.06,41.4 | 93.06,41.4 110.84,41.4 | K2.1 110.84,41.4 | 75.28,41.4 K4.1 | 57.5,41.4 K5.1 | K6.1 39.72,41.4 | K7.1 21.94,41.4 | v64.01,72.01 64.01,75.95 | v73.38,42.29 73.38,41.4 | 87.28,75.95 87.28,60.33 | 87.28,60.33 87.28,41.4 | K3.1 93.06,41.4 | 140.62,79.79 136.78,75.95 122.84,75.95 | PU1.3 87.3,60.3 87.28,60.33
  Bottom 0.203: K9.1 16.16,80.11 | K16.1 140.62,79.79
VCCLED1
  Top 0.152: R5.2 LED2.1
VCCLED2
  Top 0.152: R4.2 LED1.1
VDD
  Top 0.152: U1.6 28.43,60.18 28.57,60.33 28.57,63.12 28.38,63.31 C9.2
VIN
  Top 0.152: C4.1 16.89,54.99 R6.1 U8.1 14.67,52.38 14.48,52.2 13.72,52.2 13.46,51.94 D2.2 D5.2

## Text on the board
tNames: NC | COM | NO | NC | COM | NO | NC | COM | NO | NC | COM | NO | NC | COM | NO | NC | COM | NO | NC | COM | NO | NC | COM | NO | K09 | K10 | K11 | K12 | K13 | K14 | K15 | K16 | HIGH POWER OPTION | RESET | MODE | K09 | K10 | K11 | K12 | K13 | K14 | VCC3 | K15 | VCC5 | K16 | K08 | K07 | K06 | K05 | K04 | K03 | K02 | K01 | HIGH POWER OPTION | K08 | K07 | K06 | K05 | K04 | K03 | K02 | K01 | NO | COM | NC | NO | COM | NC | NO | COM | NC | NO | COM | NC | NO | COM | NC | NO | COM | NC | NO | COM | NC | NO | COM | NC